# Altium PCB Powerboard_Layout.PcbDoc
Units mil, origin at the board's own origin, x right, y up, seen from the top; angles counter-clockwise.
Board outline 6000 x 4000 mil, 2 copper layers (Top Layer, Bottom Layer); 86 components, 59 nets, 283 pads, 0 vias.
Unrouted connection lines stored in the file: 149.
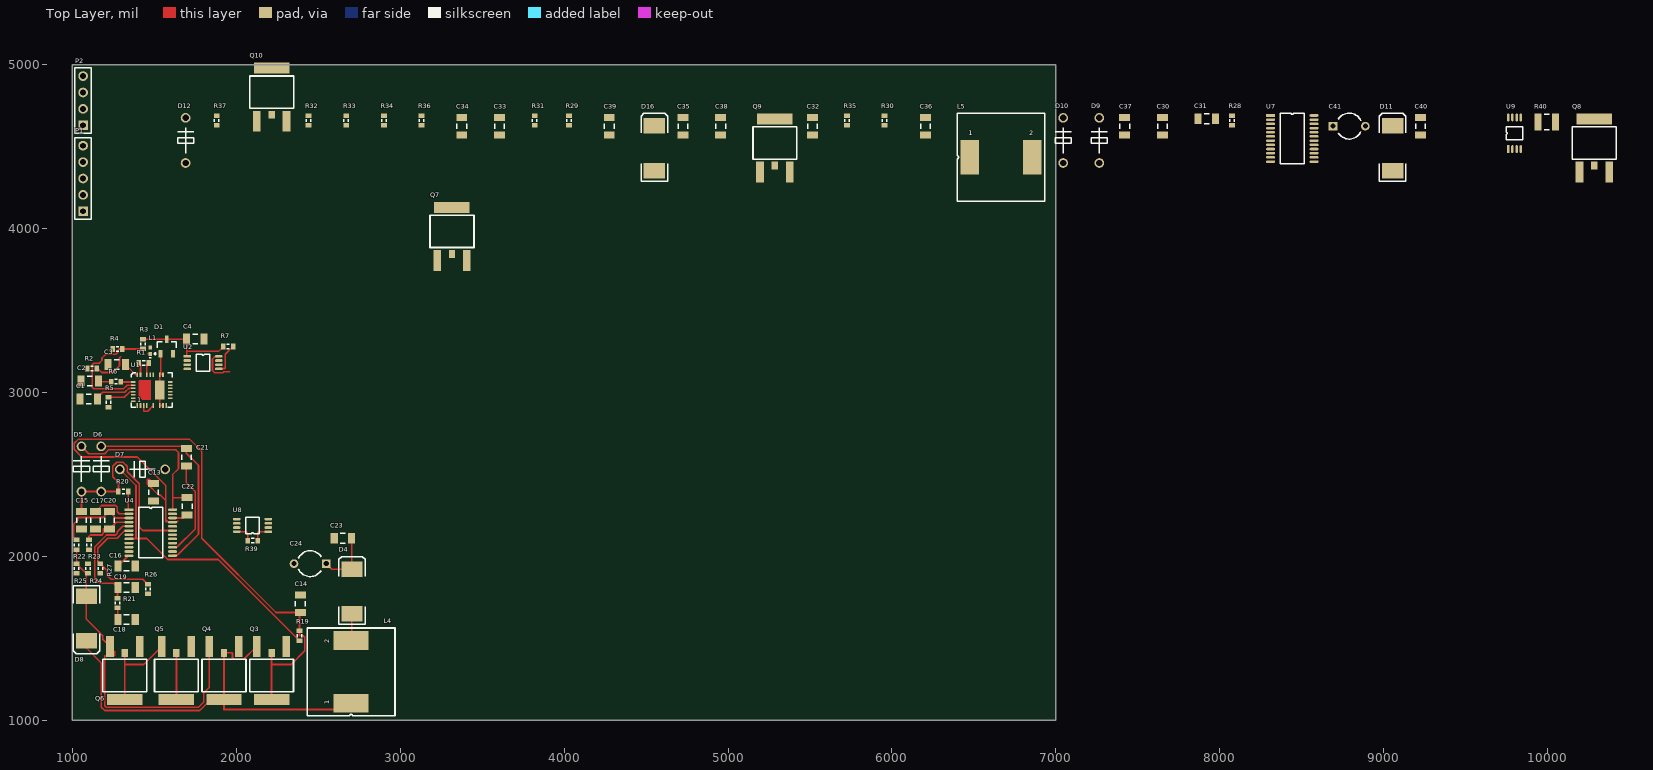
[diagram p0: Top Layer view]
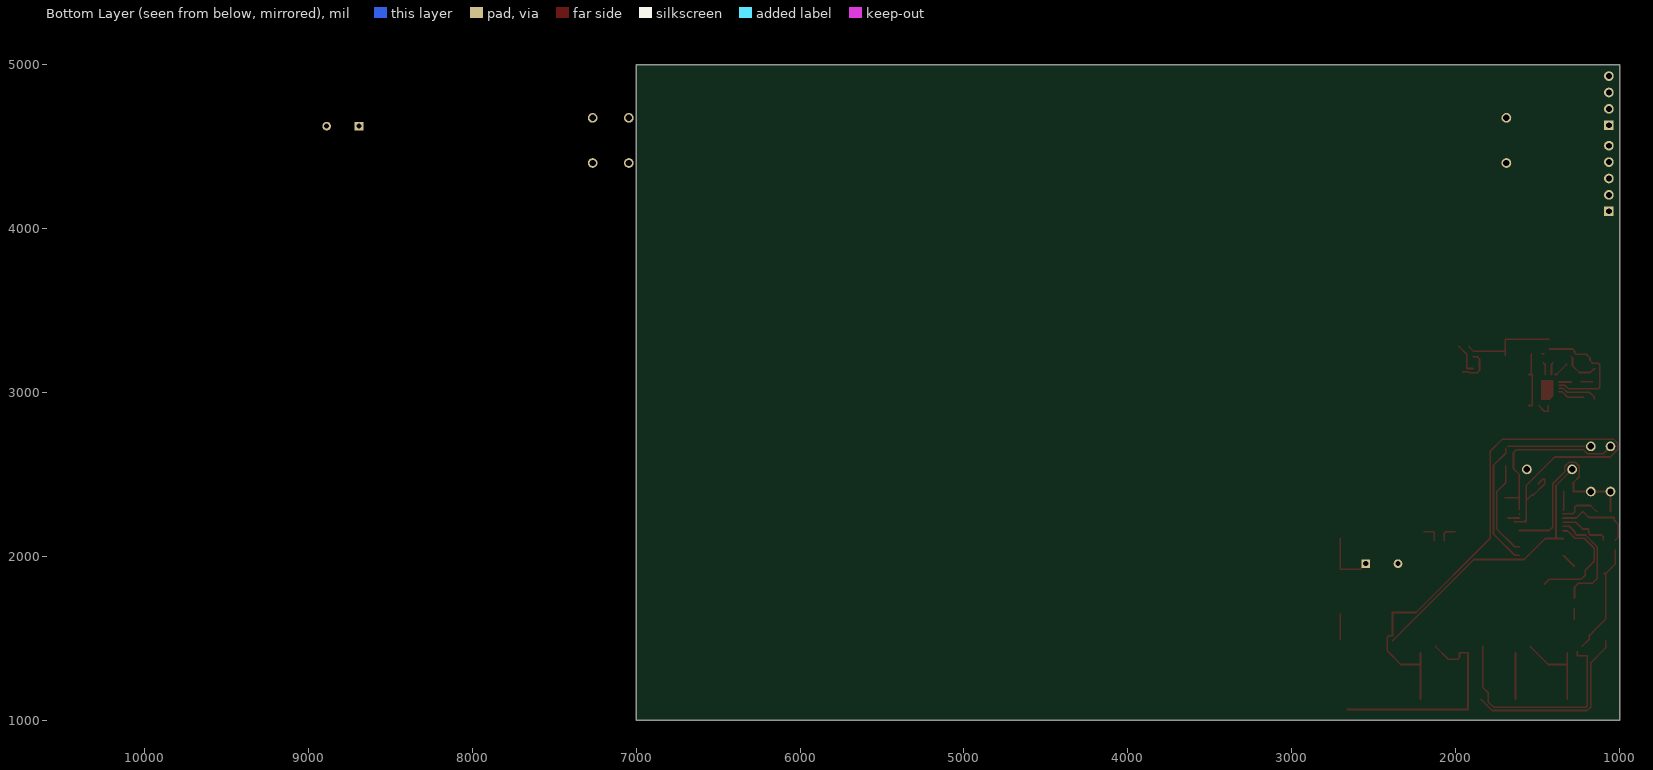
[diagram p1: Bottom Layer view, seen from below]

## Layer stack, top to bottom
Top Solder: solder mask 0.4, Solder Resist, Dk 3.5
Top Layer: signal copper 1.4
Dielectric 1: dielectric 12.6, FR-4, Dk 4.8
Bottom Layer: signal copper 1.4
Bottom Solder: solder mask 0.4, Solder Resist, Dk 3.5

## Board outline
1000,1000 7000,1000 7000,5000 1000,5000

## Design rules (kind name [scope] priority, off if disabled: settings)
Clearance [All] p1: gap=10
PolygonConnect [All] p1: connectstyle=Relief reliefconductorwidth=10 reliefentries=4 polygonreliefangle="90 Angle" airgapwidth=10
RoutingVias [All] p1: holewidth=28 width=50 viastyle="Through Hole" minholewidth=28 minwidth=50 maxholewidth=28 maxwidth=50
SolderMaskExpansion [All] p1: expansion=4
Width [All] p1: maxlimit=10 minlimit=10 preferedwidth=10
30 further rules are at their usual default settings.

## Classes and differential pairs
component class U_48V_Converter_Sub: C1 C2 C3 C4 D1 L1 R1 R2 R3 R4 R5 R6 R7 U1 U2
component class U_19V_Converter: C30 C31 C32 C33 C34 C35 C36 C37 C38 C39 C40 C41 D9 D10 D11 D12 D16 L5 Q7 Q8 Q9 Q10 R28 R29 R30 R31 R32 R33 R34 R35 R36 R37 R40 U7 U9
component class U_12V_converter3_19_2018: C13 C14 C15 C16 C17 C18 C19 C20 C21 C22 C23 C24 D4 D5 D6 D7 D8 L4 Q3 Q4 Q5 Q6 R19 R20 R21 R22 R23 R24 R25 R26 R27 R39 U4 U8
component class Powerboard_schematic_top: P1 P2

## Components (designator, comment, footprint, x,y, rotation, side; value= is the part's Value field where it differs from the comment)
C1 "Cap Semi" C1206 1100,2960 r180 top
C2 "Cap Semi" C1206 1105,3070 r180 top
C3 "Cap Semi" C1206 1270,3170 r180 top
C4 "Cap Semi" C1206 1750,3325 r0 top
C13 "Cap Semi" C1206 1495,2390 r90 top
C14 "Cap Semi" C1206 2390,1710 r270 top
C15 "Cap Semi" C1206 1055,2220 r90 top
C16 "Cap Semi" C1206 1330,1940 r180 top
C17 "Cap Semi" C1206 1140,2220 r90 top
C18 "Cap Semi" C1206 1330,1615 r180 top
C19 "Cap Semi" C1206 1330,1810 r180 top
C20 "Cap Semi" C1206 1225,2220 r90 top
C21 "Cap Semi" C1206 1695,2605 r90 top
C22 "Cap Semi" C1206 1700,2305 r90 top
C23 "Cap Semi" C1206 2650,2110 r0 top
C24 "390u" CAPR5-4X5 2450,1955 r180 top
C30 "Cap Semi" C1206 7650,4624.53 r90 top
C31 "Cap Semi" C1206 7920,4669.53 r0 top
C32 "Cap Semi" C1206 5515,4624.53 r90 top
C33 "Cap Semi" C1206 3605,4624.53 r90 top
C34 "Cap Semi" C1206 3375,4624.53 r90 top
C35 "Cap Semi" C1206 4725,4624.53 r90 top
C36 "Cap Semi" C1206 6205,4624.53 r90 top
C37 "Cap Semi" C1206 7420,4624.53 r90 top
C38 "Cap Semi" C1206 4955,4624.53 r90 top
C39 "Cap Semi" C1206 4275,4624.53 r90 top
C40 "Cap Semi" C1206 9225,4624.53 r90 top
C41 "390u" CAPR5-4X5 8790,4624.53 r0 top
D1 "Diode BAS70" SOT-23_N 1575,3280 r90 top
D4 "MBRS340" SMC 2705,1785 r90 top
D5 "1N5819" 1N5819 1055,2395 r90 top
D6 "1N5819" 1N5819 1175,2395 r90 top
D7 "MMSZ5230B" 1N5819 1565,2530 r180 top
D8 "MBRS340" SMC 1085,1620 r270 top
D9 "1N5819" 1N5819 7265,4399.53 r90 top
D10 "1N5819" 1N5819 7045,4399.53 r90 top
D11 "MBRS340" SMC 9055,4489.53 r90 top
D12 "MMSZ5230B" 1N5819 1690,4399.53 r90 top
D16 "MBRS340" SMC 4550,4489.53 r90 top
L1 "Inductor" 0402-A 1475,3255 r90 top
L4 "SRR1240-4R7MCT" SRR1240-4R7M 2700,1295 r90 top
L5 "SRR1240-4R7MCT" SRR1240-4R7M 6665,4434.53 r0 top
P1 "Header 5" HDR1X5 1065,4105 r90 top
P2 "Header 4" HDR1X4 1065,4630 r90 top
Q3 "BUK6212-40C" BUK6212-40C 2305,1450 r180 top
Q4 "BUK6212-40C" BUK6212-40C 2015,1450 r180 top
Q5 "BUK6212-40C" BUK6212-40C 1725,1450 r180 top
Q6 "BUK6212-40C" BUK6212-40C 1410,1450 r180 top
Q7 "BUK6212-40C" BUK6212-40C 3225,3805 r0 top
Q8 "BUK6212-40C" BUK6212-40C 10195,4344.53 r0 top
Q9 "BUK6212-40C" BUK6212-40C 5195,4344.53 r0 top
Q10 "BUK6212-40C" BUK6212-40C 2125,4655 r0 top
R1 "Res3" J1-0603 1435,3180 r180 top
R2 "Res3" J1-0603 1120,3145 r0 top
R3 "Res3" J1-0603 1430,3295 r270 top
R4 "Res3" J1-0603 1275,3265 r180 top
R5 "Res3" J1-0603 1220,2940 r270 top
R6 "Res3" J1-0603 1265,3065 r180 top
R7 "Res3" J1-0603 1950,3280 r0 top
R19 "Res3" J1-0603 2385,1515 r90 top
R20 "Res3" J1-0603 1310,2395 r0 top
R21 "Res3" J1-0603 1275,1715 r90 top
R22 "Res3" J1-0603 1025,2070 r270 top
R23 "Res3" J1-0603 1100,2070 r270 top
R24 "Res3" J1-0603 1095,1925 r270 top
R25 "Res3" J1-0603 1025,1925 r90 top
R26 "Res3" J1-0603 1460,1800 r270 top
R27 "Res3" J1-0603 1170,1925 r90 top
R28 "Res3" J1-0603 8075,4659.53 r90 top
R29 "Res3" J1-0603 4030,4659.53 r90 top
R30 "Res3" J1-0603 5955,4659.53 r90 top
R31 "Res3" J1-0603 3820,4659.53 r90 top
R32 "Res3" J1-0603 2440,4659.53 r90 top
R33 "Res3" J1-0603 2670,4659.53 r90 top
R34 "Res3" J1-0603 2900,4659.53 r90 top
R35 "Res3" J1-0603 5725,4659.53 r90 top
R36 "Res3" J1-0603 3130,4659.53 r90 top
R37 "Res3" J1-0603 1880,4659.53 r90 top
R39 "Res3" J1-0603 2100,2095 r180 top
R40 "Res3" 14-1210 9995,4649.53 r0 top
U1 "LT3958EUHE#PBF" LT3958 1395,2920 r0 top
U2 "AD8217" AD8217 1700,3220 r0 top
U4 "LTC3780EG#PBF" "LTC3780 24-Lead Plastic SSOP" 1345,2285 r0 top
U7 "LTC3780EG#PBF" "LTC3780 24-Lead Plastic SSOP" 8310,4689.53 r0 top
U8 "AD8217" AD8217 2195,2150 r180 top
U9 "AD8217" AD8217 9760,4484.53 r90 top

## Footprints (in the part's own frame and the unit in brackets; to place one, negate y for a bottom-side part, rotate by r counter-clockwise, add the part's x,y. Pads: shape width x height; smd on the part's side, far side on the other; paste and mask are expansions set on the pad)
1N5819 [mm]
  round 1.5 hole 1: 1(0,0) 2(7,0)
  silkscreen extent 1.5,-1.25 5.5,1.25
14-1210 [mm] "Chip Resistor, Body 3.2x2.5mm, IPC High Density"
  rect 1.1x2.6 smd: 1(-1.35,0) 2(1.35,0)
  silkscreen extent -0.4,-1.2 0.4,1.2, body extent -1.68,-1.32 1.68,1.32, height 0.9
0402-A [mm] "Chip Inductor, Body 1.0x0.5mm, IPC High Density"
  rect 0.6x0.5 smd: 1(-0.5,0) 2(0.5,0)
  silkscreen extent -1.1,-0.15 -1.1,0.15, body extent -0.55,-0.3 0.55,0.3, height 0.55
AD8217 [mm]
  rect 1.2x0.4 smd: 1(0,0)
  oval 1.2x0.4 smd: 2(0,-0.65) 3(0,-1.3) 4(0,-1.95) 5(4.9,-1.95) 6(4.9,-1.3) 7(4.9,-0.65) 8(4.9,0)
  silkscreen extent 1.43,-2.28 3.47,0.33
BUK6212-40C [mm]
  rect 1.2x3.2 smd: 1(0,0) 2(4.6,0)
  rect 5.5x1.7 smd: 3(2.3,8.2)
  rect 1x1.2 smd: 3(2.3,1)
  silkscreen extent -1.1,2 5.7,7
C1206 [mm] "Chip Capacitor, Body 3.2x1.6mm, IPC High Density"
  rect 1.1x1.7 smd: 1(-1.35,0) 2(1.35,0)
  silkscreen extent -0.4,-0.75 0.4,0.75, body extent -1.7,-0.9 1.7,0.9, height 1.3
CAPR5-4X5 [mm] "Capacitor; 2 Leads"
  rect 1.35x1.35 hole 0.8: 1(-2.5,0)
  round 1.35 hole 0.8: 2(2.5,0)
  silkscreen extent -1.69,-2 1.82,2
HDR1X4 [mm] "Connector; Header; 4 Position"
  rect 1.5x1.5 hole 0.9: 1(0,0)
  round 1.5 hole 0.9: 2(2.54,0) 3(5.08,0) 4(7.62,0)
  silkscreen extent -1.27,-1.27 8.89,1.27
HDR1X5 [mm] "Connector; Header; 5 Position"
  rect 1.5x1.5 hole 0.9: 1(0,0)
  round 1.5 hole 0.9: 2(2.54,0) 3(5.08,0) 4(7.62,0) 5(10.16,0)
  silkscreen extent -1.27,-1.27 11.43,1.27
J1-0603 [mm] "Chip Resistor, Body 1.6x0.8mm, IPC High Density"
  rect 0.7x0.9 smd: 1(-0.75,0) 2(0.75,0)
  silkscreen extent -0.2,-0.35 0.2,0.35, body extent -0.85,-0.48 0.85,0.48, height 0.9
LT3958 [mm]
  rect 0.25x0.7 smd: 1(0,0) 2(0.5,0) 3(1,0) 4(1.5,0) 6(2.5,0) 8(3.5,0) 9(4,0) 10(4.5,0) 20(4,4.8) 21(3.5,4.8) 23(2.5,4.8) 24(2,4.8) 25(1.5,4.8) 27(0.5,4.8) 28(0,4.8)
  rect 0.7x0.25 smd: 12(5.15,1.15) 13(5.15,1.65) 14(5.15,2.15) 15(5.15,2.65) 16(5.15,3.15) 17(5.15,3.65) 30(-0.65,3.65) 31(-0.65,3.15) 32(-0.65,2.65) 33(-0.65,2.15) 34(-0.65,1.65) 35(-0.65,1.15) 36(-0.65,0.65)
  rrect10% 1.53x3 smd mask+0: 38(3.5,2.4)
  Top Layer region: 0.25,1.45 0.25,3.775 0.267,3.837 0.313,3.883 0.375,3.9 0.375,3.9 2,3.9 2.048,3.891 2.089,3.864 2.116,3.823 2.125,3.775 2.125,3.775 2.125,1.025 2.116,0.977 2.088,0.937 2.048,0.909 2,0.9 2,0.9 0.8,0.9
  silkscreen extent -0.9,-0.25 5.4,5.05
"LTC3780 24-Lead Plastic SSOP" [mm]
  rect 1.4x0.4 smd: 1(0,0)
  oval 1.4x0.4 smd: 2(0,-0.65) 3(0,-1.3) 4(0,-1.95) 5(0,-2.6) 6(0,-3.25) 7(0,-3.9) 8(0,-4.55) 9(0,-5.2) 10(0,-5.85) 11(0,-6.5) 12(0,-7.15) 13(6.75,-7.15) 14(6.75,-6.5) 15(6.75,-5.85) 16(6.75,-5.2) 17(6.75,-4.55) 18(6.75,-3.9) 19(6.75,-3.25) 20(6.75,-2.6) 21(6.75,-1.95) 22(6.75,-1.3) 23(6.75,-0.65) 24(6.75,0)
  silkscreen extent 1.53,-7.48 5.22,0.33
SMC [mm] "DO-214-AB/SMC; 2 C-Bend Leads; Body 7.9 x 5.9 mm, inc. leads (LxW)"
  rect 2.4x3.3 smd: 1(-3.475,0) 2(3.475,0)
  silkscreen extent -5.07,-2.05 5.43,2.05
SOT-23_N [mm] "SOT23, 3-Leads, Body 2.9x1.3mm, Pitch 0.95mm, Lead Span 2.5mm, IPC Medium Density"
  rect 1.15x0.6 smd: 1(-1.125,0.95) 2(-1.125,-0.95) 3(1.125,0)
  silkscreen extent -1.25,-1.5 0.7,1.92, body extent -0.7,-1.5 0.7,1.5, height 1.1
SRR1240-4R7M [mm]
  rect 2.9x5.4 smd: 1(-4.85,0) 2(4.85,0)
  silkscreen extent -6.8,-6.8 6.8,6.8

## Part data
C1 C2 C3 C4 C13 C14 C15 C16 C17 C18 C19 C20 C21 C22 C23 C30 C31 C32 C33 C34 C35 C36 C37 C38 C39 C40: "Capacitor (Semiconductor SIM Model)"
C24 C41: library part Alum_Cap
D1: "Silicon AF Schottky Diode for High-Speed Switching"
D4 D8 D11 D16: library part Diode, "Default Diode"
D5 D6 D7 D9 D10 D12 Q3 Q4 Q5 Q6 Q7 Q8 Q9 Q10: library part Component_1
P1: "Header, 5-Pin"
P2: "Header, 4-Pin"
R1 R2 R3 R4 R5 R6 R7 R19 R20 R21 R22 R23 R24 R25 R26 R27 R28 R29 R30 R31 R32 R33 R34 R35 R36 R37 R39 R40: "Resistor"
U1: "High Input Voltage, Boost, Flyback, SEPIC and Inverting Converter, 36-pin QFN (UHE-36-UHE28MA), -40 to 125 degC, Pb-Free"
U2: "Current Sense"
U4 U7: "Buck-boost Controller, Constant Frequency, Current Mode Control with Power Good Output, 24-pin SOP (G-24), -40 to 85 degC, Pb-Free"
U8 U9: library part Component_1, "Current Shunt Moniter"

## Nets (pads, with @x,y where several pads share a name; then routed paths per layer and width w, separated by ;. In a path a pad name is that pad's centre, name@x,y a point inside that pad or via, vN(x,y) a via of type N, cw(c..) or ccw(c..) an arc to the next point about the centre after c; other vN are vias at no path point)
BG1: Q10.1 U7.18
BG1_12V: Q6.1 U4.18
BG2: Q8.1 U7.16
BG2_12V: Q4.1 U4.16
DQ9: C40.2 C41.1 D11.2 Q9.3 R35.2 R40.1 U9.1
DQ10: C37.1 D11.1 L5.2 Q9.2 Q10.3 U7.22
GND: C1.2 C2.2 C3.2 C4.2 C13.1 C14.1 C15.1 C16.1 C17.1 C18.1 C19.1 C23.1 C24.2 C30.1 C31.1 C32.1 C33.1 C34.1 C35.1 C38.1 C40.1 C41.2 D7.1 D12.1 P1.1 P2.4 R2.1 R4.2 R5.2 R23.2 R24.1 R25.1 R27.1 R32.2 R33.1 R34.1 R37.1 U1.1 U1.2 U1.4 U1.10 U1.12 U1.13 U1.14 U1.15 U1.16 U1.17 U1.23 U1.24 U1.34 U1.35 U1.36 U2.2 U2.3 U2.4 U2.6 U2.7 U4.7 U4.9 U4.10 U4.11 U4.17 U4.20 U7.7 U7.9 U7.10 U7.11 U7.17 U7.20 U8.4 U9.4
NetC1_1: C1.1 U1.32 | length 254.7
  Top Layer w10: C1.1 1153.15,2969.68 1185,3001.54 1319.82,3001.54 1342.3,3024.02 1348.87,3024.02 ; 1342.61,3024.33 U1.32
NetC2_1: C2.1 R6.2 | length 72.3
  Top Layer w10: C2.1@1163.15,3065 R6.2
NetC3_1: C3.1 U1.28 | length 97.1
  Top Layer w10: C3.1 1384.17,3108.98 U1.28
NetC4_1: C4.1 D1.3 R3.1 R7.1 U2.1 | length 603.8
  Top Layer w10: R3.1@1430.24,3324.29 D1.3 C4.1@1696.14,3324.29 ; U2.1@1696.85,3223.15 1696.85,3250 ; C4.1 1696.85,3250 ; R7.1 1890.47,3250 1696.85,3250
NetC13_2: C13.2 C14.2 C30.2 C31.2 L1.1 P1.5 Q3.3 Q7.3 R1.2 R19.2 R28.2 U1.27 U4.21 U7.21 | length 4250
  Top Layer w10: R1.2 1414.92,3170.55 U1.27@1414.92,3108.98 ; 1460.79,3235.32 L1.1 ; C13.2 1468.35,2469.8 1459.46,2469.8 1456.54,2466.87 1456.54,2442.22 1525.25,2373.5 1534.68,2373.5 1568.19,2339.99 ; Q3.3@2214.45,1127.17 2214.45,1340 ; Q3.3@2214.45,1410.63 2214.45,1340 ; 1568.19,2224.34 1568.19,2339.99 ; 1568.19,2224.34 1568.19,2212.9 1570.14,2210.94 1581.59,2210.94 ; 1568.19,2224.34 1581.59,2210.94 ; 1568.19,2339.99 1568.19,2432.15 1394.28,2606.06 1056.56,2606.06 1010.47,2652.15 1010.47,2689.03 1036.56,2715.12 1714.36,2715.12 1788.46,2641.02 1788.46,2110.29 2241.91,1656.85 C14.2 2385,1651.85 R19.2 2385,1514.25 2408.93,1514.25 2417.72,1505.47 2417.72,1422.72 2335,1340 2214.45,1340 ; 1581.59,2210.94 1639.91,2210.94 ; 1639.91,2210.94 1643.31,2210.94 1643.31,2213.56 1643.05,2213.82 1642.78,2213.82 1639.91,2210.94
NetC15_2: C15.2 D5.1 D6.1 R20.1 U4.19 | length 1239.3
  Top Layer w10: C15.2 D5.1 D6.1 R20.1 1280.47,2449.88 1244.88,2485.47 1244.88,2548.44 1270.97,2574.53 1307.85,2574.53 1333.94,2548.44 1333.94,2516.06 1407.56,2442.44 1407.56,2177.44 1427.95,2157.05 U4.19
NetC16_2: C16.2 U4.12 | length 94.5
  Top Layer w10: C16.2 1340.35,2003.5 U4.12
NetC17_2: C17.2 U4.2 | length 258.3
  Top Layer w10: C17.2 1176.65,2309.8 1264.68,2309.8 1273.46,2301.02 1273.46,2271.54 1285.59,2259.41 U4.2
NetC18_2: C18.2 R21.1 | length 68.6
  Top Layer w10: C18.2 R21.1@1276.85,1683.62
NetC19_2: C19.2 R21.2 U4.5 | length 688.3
  Top Layer w10: R21.2 C19.2@1275,1808.15 ; C19.2 1251.85,1835 1165,1835 1135,1865 1135,2057.23 1207.96,2130.2 1264.68,2130.2 1273.46,2138.98 1273.46,2148.99 1307.11,2182.64 U4.5
NetC20_1: C20.1 R23.1 U4.4 | length 318.3
  Top Layer w10: R23.1 1100,2120 1110.2,2130.2 1179.68,2130.2 1188.46,2138.98 1188.46,2166.85 C20.1 1266.38,2208.23 U4.4
NetC20_2: C20.2 R22.1 U4.3 | length 499.9
  Top Layer w10: R22.1 1006.54,2117.99 1006.54,2194.72 1031.5,2219.68 1031.5,2236.5 1188.35,2236.5 C20.2 1264.33,2233.82 U4.3
NetC21_1: C21.1 D8.2 L4.1 Q3.2 Q4.3 U4.15 | length 3085.1
  Top Layer w10: D8.2 1085,1440 1176.18,1348.82 1176.18,1079.2 1196.68,1058.7 1776.98,1058.7 Q4.3@1845.45,1127.17 ; U4.15 1613.46,2057.4 1639.91,2057.4 1748.46,2165.96 1748.46,2394.8 1695,2448.27 C21.1 ; Q3.2@2122.83,1450 2044.84,1372.01 1985.16,1372.01 1976.38,1380.79 1976.38,1409.08 1974.83,1410.63 1924.45,1410.63 1924.45,1127.17 1924.45,1065.55 L4.1@2661.5,1065.55
NetC21_2: C21.2 D6.2 U4.13 | length 1273.5
  Top Layer w10: D6.2 C21.2@1682.56,2670.59 ; U4.13 1613.46,2006.22 1639.91,2006.22 1768.46,2134.78 1768.46,2554.72 1695,2628.18 C21.2
NetC22_1: C22.1 D4.1 L4.2 Q5.2 Q6.3 U4.22 | length 781.9
  Top Layer w10: Q6.3@1319.45,1127.17 1319.45,1340 ; Q6.3@1319.45,1410.63 1319.45,1340 ; Q5.2 1433.9,1340 1319.45,1340 ; U4.22 C22.1@1681.97,2233.82 ; L4.2@2705,1490.94 D4.1
NetC22_2: C22.2 D5.2 U4.24 | length 1090.1
  Top Layer w10: D5.2@1063.94,2679.53 D5.2 1099.53,2626.06 1196.06,2626.06 1220,2650 1630,2650 1646.54,2633.46 1646.54,2535 1610.75,2499.21 U4.24 ; 1612.6,2358.15 C22.2
NetC23_2: C23.2 C24.1 D4.2 Q5.3 R26.2 R39.1 U8.1 | length 760
  Top Layer w10: Q5.3@1634.45,1127.17 Q5.3@1634.45,1410.63 ; R39.1 2129.53,2144.53 2135,2150 U8.1 ; C24.1 2581.61,1921.81 D4.2 2703.15,1923.66 C23.2
NetC32_2: C32.2 U7.12
NetC33_2: C33.2 R29.2 U7.5
NetC34_2: C34.2 R29.1
NetC35_2: C35.2 U7.2
NetC36_1: C36.1 D16.2 L5.1 Q7.2 Q8.3 U7.15
NetC36_2: C36.2 D9.2 U7.13
NetC37_2: C37.2 D10.2 U7.24
NetC38_2: C38.2 D9.1 D10.1 R30.1 U7.19
NetC39_1: C39.1 R32.1 U7.4
NetC39_2: C39.2 R31.1 U7.3
NetD1_1: D1.1 L1.2 U1.8 U1.9 U1.20 U1.21 U1.38 | length 350.3
  Top Layer w10: U1.21@1537.6,3113.78 D1.1 ; U1.9 U1.8 U1.21 U1.20
NetD7_2: D7.2 R19.1 U4.8 | length 1762.1
  Top Layer w10: D7.2 1387.56,2431.85 1387.56,2110.53 1385.61,2108.58 ; U4.8 1347.72,2108.58 1385.61,2108.58 ; R19.1 1889.84,1980.63 1581.59,1980.63 1453.64,2108.58 1385.61,2108.58
NetD8_1: D8.1 Q4.2 Q6.2 R22.2 R24.2 R25.2 | length 2059.3
  Top Layer w10: R22.2 R25.2 1084.06,1895.47 R24.2 1085,1885.47 D8.1 1085,1616.61 1164.96,1536.65 1164.96,1535.04 1185,1515 1185,1493.9 Q6.2 ; 1257.52,1421.38 1257.52,1394.13 1196.18,1394.13 1196.18,1087.49 1204.97,1078.7 1768.7,1078.7 1801.18,1111.18 1801.18,1166.84 1833.9,1199.56 Q4.2
NetD16_1: D16.1 Q8.2 Q10.2 R31.2 R33.2 R34.2
NetP1_2: P1.2 R39.2 U8.8 | length 117.3
  Top Layer w10: U8.8 2060,2150 2070.47,2139.53 R39.2
NetP1_3: P1.3 R40.2 U9.8
NetP1_4: P1.4 R7.2 U2.5 | length 194.1
  Top Layer w10: U2.5 1892.91,3145.94 1929.58,3145.94 1931.54,3147.9 1931.54,3232.01 R7.2
NetP2_1: P2.1 U2.8 | length 230.2
  Top Layer w10: U2.8 1892.91,3217.28 1867.69,3217.28 1854.29,3203.88 1854.29,3133.75 1867.69,3120.35 1918.14,3120.35 1922.78,3125 1960,3125
NetP2_2: P2.2 U9.5
NetP2_3: P2.3 U8.5
NetR1_1: R1.1 R2.2 U1.25 | length 298.2
  Top Layer w10: R2.2 1155,3145 1178.46,3121.54 1244.72,3121.54 1286.5,3163.31 1286.5,3209.68 1295.28,3218.46 ; U1.25@1453.82,3108.98 1453.82,3169.29 R1.1
NetR3_2: R3.2 R4.1 U1.31 | length 764.7
  Top Layer w10: U1.31 1334.02,3044.02 1311.54,3021.54 1130.28,3021.54 1120.75,3031.07 1120.75,3168.93 1129.53,3177.72 1162.91,3177.72 1180.2,3195 1180.2,3209.68 1202.8,3232.28 1265.47,3232.28 1274.25,3241.07 1274.25,3254.25 1285,3265 R4.1 R3.2@1429.53,3265
NetR5_1: R5.1 U1.33 | length 164
  Top Layer w10: R5.1 1316.1,2969.53 1351.21,3004.65 U1.33
NetR6_1: R6.1 U1.30 | length 73.6
  Top Layer w10: R6.1@1295.83,3063.7 U1.30
NetR20_2: R20.2 U4.1 | length 117.7
  Top Layer w10: R20.2 1339.53,2285.04 1342.28,2282.28 U4.1
NetR26_1: R26.1 R27.2 U4.6 | length 695.2
  Top Layer w10: U4.6 1342.28,2154.33 1315.84,2154.33 1302.44,2140.93 1302.44,2139.68 1272.24,2109.48 1215.52,2109.48 1155,2048.95 1155,1969.53 R27.2 1210,1914.53 1210,1885 1235,1860 1429.53,1860 R26.1
NetR30_2: R30.2 U7.1
NetR35_1: R35.1 R36.2 U7.6
NetR36_1: R36.1 R37.2
NetU1_3: U1.3 U1.6 | length 107.4
  Top Layer w10: U1.3 1434.37,2885.63 1459.6,2885.63 U1.6@1493.42,2919.46
RUN: D12.2 R28.1 U7.8
TG1: Q9.1 U7.23
TG1_12V: Q5.1 U4.23 | length 3.5
  Top Layer w10: U4.23@1608.25,2256.92 U4.23
TG2: Q7.1 U7.14
TG2_12V: Q3.1 U4.14
pads on no net: D1.2 U8.2 U8.3 U8.6 U8.7 U9.2 U9.3 U9.6 U9.7

## Text inside footprints (layer, text, board x,y; h text height)
L4: Top Overlay "1" at 2566.14,1098.15 h30 r90; Top Overlay "1" at 2566.14,1098.15 h30 r90; Top Overlay "2" at 2566.14,1468.23 h30 r90
L5: Top Overlay "1" at 6468.15,4568.39 h30; Top Overlay "1" at 6468.15,4568.39 h30; Top Overlay "2" at 6838.23,4568.39 h30
U1: Top Overlay "1" at 1395,2940.67 h30